# Altium PCB AudioAmpPCB.PcbDoc (part 2 of 2)
Units mm, origin at the board's own origin, x right, y up, seen from the top; angles counter-clockwise.
Board outline 120 x 80 mm, 2 copper layers (Top Layer, Bottom Layer); 101 components, 39 nets, 208 pads, 0 vias.
Unrouted connection lines stored in the file: 151.
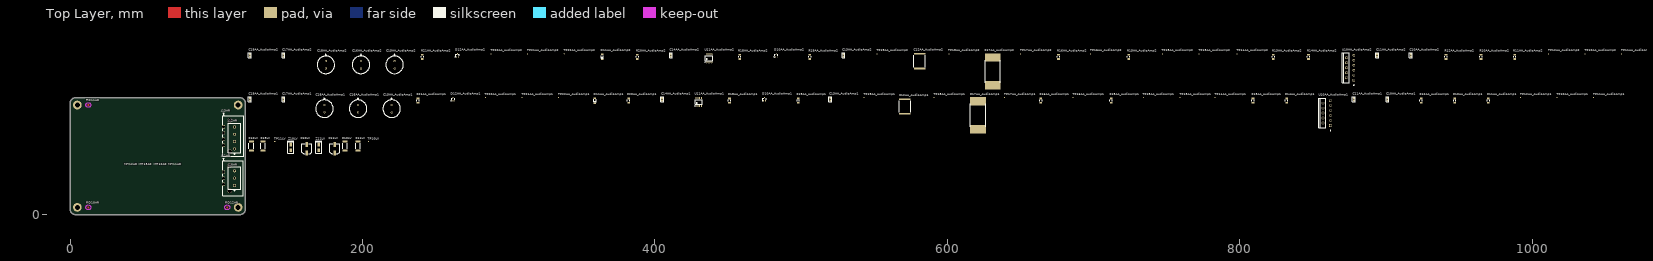
[diagram p0: Top Layer view]

## Nets (pads, with @x,y where several pads share a name; then routed paths per layer and width w, separated by ;. In a path a pad name is that pad's centre, name@x,y a point inside that pad or via, vN(x,y) a via of type N, cw(c..) or ccw(c..) an arc to the next point about the centre after c; other vN are vias at no path point)
+14V: C17AA_AudioAmp1.2 C17AA_AudioAmp2.2 U11AA_AudioAmp1.7 U11AA_AudioAmp2.7
+15V: C10LV.1 R11LV.2 TP10LV.1 Z10LV.K
+34V: C18AA_AudioAmp1.1 C18AA_AudioAmp2.1 C19AA_AudioAmp1.2 C19AA_AudioAmp2.2 J10AR.1 J11AR.1 R10LV.1 U10AA_AudioAmp1.1 U10AA_AudioAmp1.5 U10AA_AudioAmp2.1 U10AA_AudioAmp2.5
+OUT1: C14AA_AudioAmp2.2 D12AA_AudioAmp2.3 J12AR.1 J13AR.1 R11AA_AudioAmp2.2 R17AA_AudioAmp2.2 R21AA_AudioAmp2.2 TP11AA_AudioAmp2.1 TP22AA_AudioAmp2.1 U11AA_AudioAmp2.3
+OUT2: C14AA_AudioAmp1.2 D12AA_AudioAmp1.3 J12AR.3 J13AR.3 R11AA_AudioAmp1.2 R17AA_AudioAmp1.2 R21AA_AudioAmp1.2 TP11AA_AudioAmp1.1 TP22AA_AudioAmp1.1 U11AA_AudioAmp1.3
-14V: C17AA_AudioAmp1.1 C17AA_AudioAmp2.1 U11AA_AudioAmp1.4 U11AA_AudioAmp2.4
-15V: C11LV.2 R13LV.2 TP11LV.1 Z11LV.A
-34V: C16AA_AudioAmp1.2 C16AA_AudioAmp2.2 C19AA_AudioAmp1.1 C19AA_AudioAmp2.1 J10AR.3 J11AR.3 R12LV.1 U10AA_AudioAmp1.4 U10AA_AudioAmp2.4
-OUT1: C13AA_AudioAmp1.1 C13AA_AudioAmp2.1 C15AA_AudioAmp1.2 C15AA_AudioAmp2.2 C16AA_AudioAmp1.1 C16AA_AudioAmp2.1 C18AA_AudioAmp1.2 C18AA_AudioAmp2.2 J12AR.2 J12AR.4 J13AR.2 J13AR.4 R10AA_AudioAmp1.1 R10AA_AudioAmp2.1 R18AA_AudioAmp1.2 R18AA_AudioAmp2.2 R20AA_AudioAmp1.2 R20AA_AudioAmp2.2 TP20AA_AudioAmp1.1 TP20AA_AudioAmp2.1 U10AA_AudioAmp1.7 U10AA_AudioAmp2.7
GND: C10LV.2 C11LV.1 J10AR.2 J11AR.2 Z10LV.A Z11LV.K
IN+: C12AA_AudioAmp1.2 C12AA_AudioAmp2.2 TP17AA_AudioAmp1.1 TP17AA_AudioAmp2.1
NetC10AA_AudioAmp1_1: C10AA_AudioAmp1.1 C14AA_AudioAmp1.1 D10AA_AudioAmp1.3 R13AA_AudioAmp1.2 R15AA_AudioAmp1.1 TP16AA_AudioAmp1.1 U11AA_AudioAmp1.6
NetC10AA_AudioAmp1_2: C10AA_AudioAmp1.2 R12AA_AudioAmp1.2
NetC10AA_AudioAmp2_1: C10AA_AudioAmp2.1 C14AA_AudioAmp2.1 D10AA_AudioAmp2.3 R13AA_AudioAmp2.2 R15AA_AudioAmp2.1 TP16AA_AudioAmp2.1 U11AA_AudioAmp2.6
NetC10AA_AudioAmp2_2: C10AA_AudioAmp2.2 R12AA_AudioAmp2.2
NetC11AA_AudioAmp1_1: C11AA_AudioAmp1.1 R10AA_AudioAmp1.2 R11AA_AudioAmp1.1 TP10AA_AudioAmp1.1 U10AA_AudioAmp1.10
NetC11AA_AudioAmp1_2: C11AA_AudioAmp1.2 R14AA_AudioAmp1.1
NetC11AA_AudioAmp2_1: C11AA_AudioAmp2.1 R10AA_AudioAmp2.2 R11AA_AudioAmp2.1 TP10AA_AudioAmp2.1 U10AA_AudioAmp2.10
NetC11AA_AudioAmp2_2: C11AA_AudioAmp2.2 R14AA_AudioAmp2.1
NetC12AA_AudioAmp1_1: C12AA_AudioAmp1.1 R16AA_AudioAmp1.1 R18AA_AudioAmp1.1 TP13AA_AudioAmp1.1
NetC12AA_AudioAmp2_1: C12AA_AudioAmp2.1 R16AA_AudioAmp2.1 R18AA_AudioAmp2.1 TP13AA_AudioAmp2.1
NetC13AA_AudioAmp1_2: C13AA_AudioAmp1.2 R16AA_AudioAmp1.2 TP14AA_AudioAmp1.1 U11AA_AudioAmp1.2
NetC13AA_AudioAmp2_2: C13AA_AudioAmp2.2 R16AA_AudioAmp2.2 TP14AA_AudioAmp2.1 U11AA_AudioAmp2.2
NetC15AA_AudioAmp1_1: C15AA_AudioAmp1.1 R21AA_AudioAmp1.1 TP21AA_AudioAmp1.1
NetC15AA_AudioAmp2_1: C15AA_AudioAmp2.1 R21AA_AudioAmp2.1 TP21AA_AudioAmp2.1
NetD10AA_AudioAmp1_A1: D10AA_AudioAmp1.1 D11AA_AudioAmp1.2 D12AA_AudioAmp1.1
NetD10AA_AudioAmp1_K2: D10AA_AudioAmp1.2 D11AA_AudioAmp1.1 D12AA_AudioAmp1.2
NetD10AA_AudioAmp2_A1: D10AA_AudioAmp2.1 D11AA_AudioAmp2.2 D12AA_AudioAmp2.1
NetD10AA_AudioAmp2_K2: D10AA_AudioAmp2.2 D11AA_AudioAmp2.1 D12AA_AudioAmp2.2
NetR10LV_2: R10LV.2 R11LV.1
NetR12AA_AudioAmp1_1: R12AA_AudioAmp1.1 R13AA_AudioAmp1.1 TP12AA_AudioAmp1.1 U11AA_AudioAmp1.8
NetR12AA_AudioAmp2_1: R12AA_AudioAmp2.1 R13AA_AudioAmp2.1 TP12AA_AudioAmp2.1 U11AA_AudioAmp2.8
NetR12LV_2: R12LV.2 R13LV.1
NetR17AA_AudioAmp1_1: R17AA_AudioAmp1.1 R19AA_AudioAmp1.2 TP15AA_AudioAmp1.1 U10AA_AudioAmp1.3
NetR17AA_AudioAmp2_1: R17AA_AudioAmp2.1 R19AA_AudioAmp2.2 TP15AA_AudioAmp2.1 U10AA_AudioAmp2.3
NetR20AA_AudioAmp1_1: R20AA_AudioAmp1.1 TP18AA_AudioAmp1.1 U10AA_AudioAmp1.8
NetR20AA_AudioAmp2_1: R20AA_AudioAmp2.1 TP18AA_AudioAmp2.1 U10AA_AudioAmp2.8
OA_VIN-_POW_AudioAmp1: R14AA_AudioAmp1.2 R15AA_AudioAmp1.2 R19AA_AudioAmp1.1 TP19AA_AudioAmp1.1 U10AA_AudioAmp1.9
OA_VIN-_POW_AudioAmp2: R14AA_AudioAmp2.2 R15AA_AudioAmp2.2 R19AA_AudioAmp2.1 TP19AA_AudioAmp2.1 U10AA_AudioAmp2.9
pads on no net: J11AR.M1 J11AR.M2 J13AR.M1 J13AR.M2 MH10AR.1 MH11AR.1 MH12AR.1 MH13AR.1 U10AA_AudioAmp1.2 U10AA_AudioAmp1.6 U10AA_AudioAmp1.11 U10AA_AudioAmp2.2 U10AA_AudioAmp2.6 U10AA_AudioAmp2.11 U11AA_AudioAmp1.1 U11AA_AudioAmp1.5 U11AA_AudioAmp2.1 U11AA_AudioAmp2.5

## Silkscreen, mask and mechanical layers (free items; w line width, h text height)
Mechanical 1:
  lines w0.2: 116,0 4,0 cw(c4,4) 0,4 0,76 cw(c4,76) 4,80 116,80 cw(c116,76) 120,76 120,4 ; 116,2 ccw(c116,6) 120,6

## Text inside footprints (layer, text, board x,y; h text height)
U10AA_AudioAmp1: Mechanical 13 "TAB" at 855.003,69.033 h0.64 r90
U10AA_AudioAmp2: Mechanical 13 "TAB" at 871.003,100.033 h0.64 r90